# Altium PCB praline.PcbDoc (part 3 of 8)
Units mm, origin at the board's own origin, x right, y up, seen from the top; angles counter-clockwise.
Board outline 152.4 x 101.6 mm, 6 copper layers (In2.Cu, F.Cu, B.Cu, In1.Cu, In3.Cu, In4.Cu); 581 components, 490 nets, 2812 pads, 953 vias.
Unrouted connection lines stored in the file: 404.
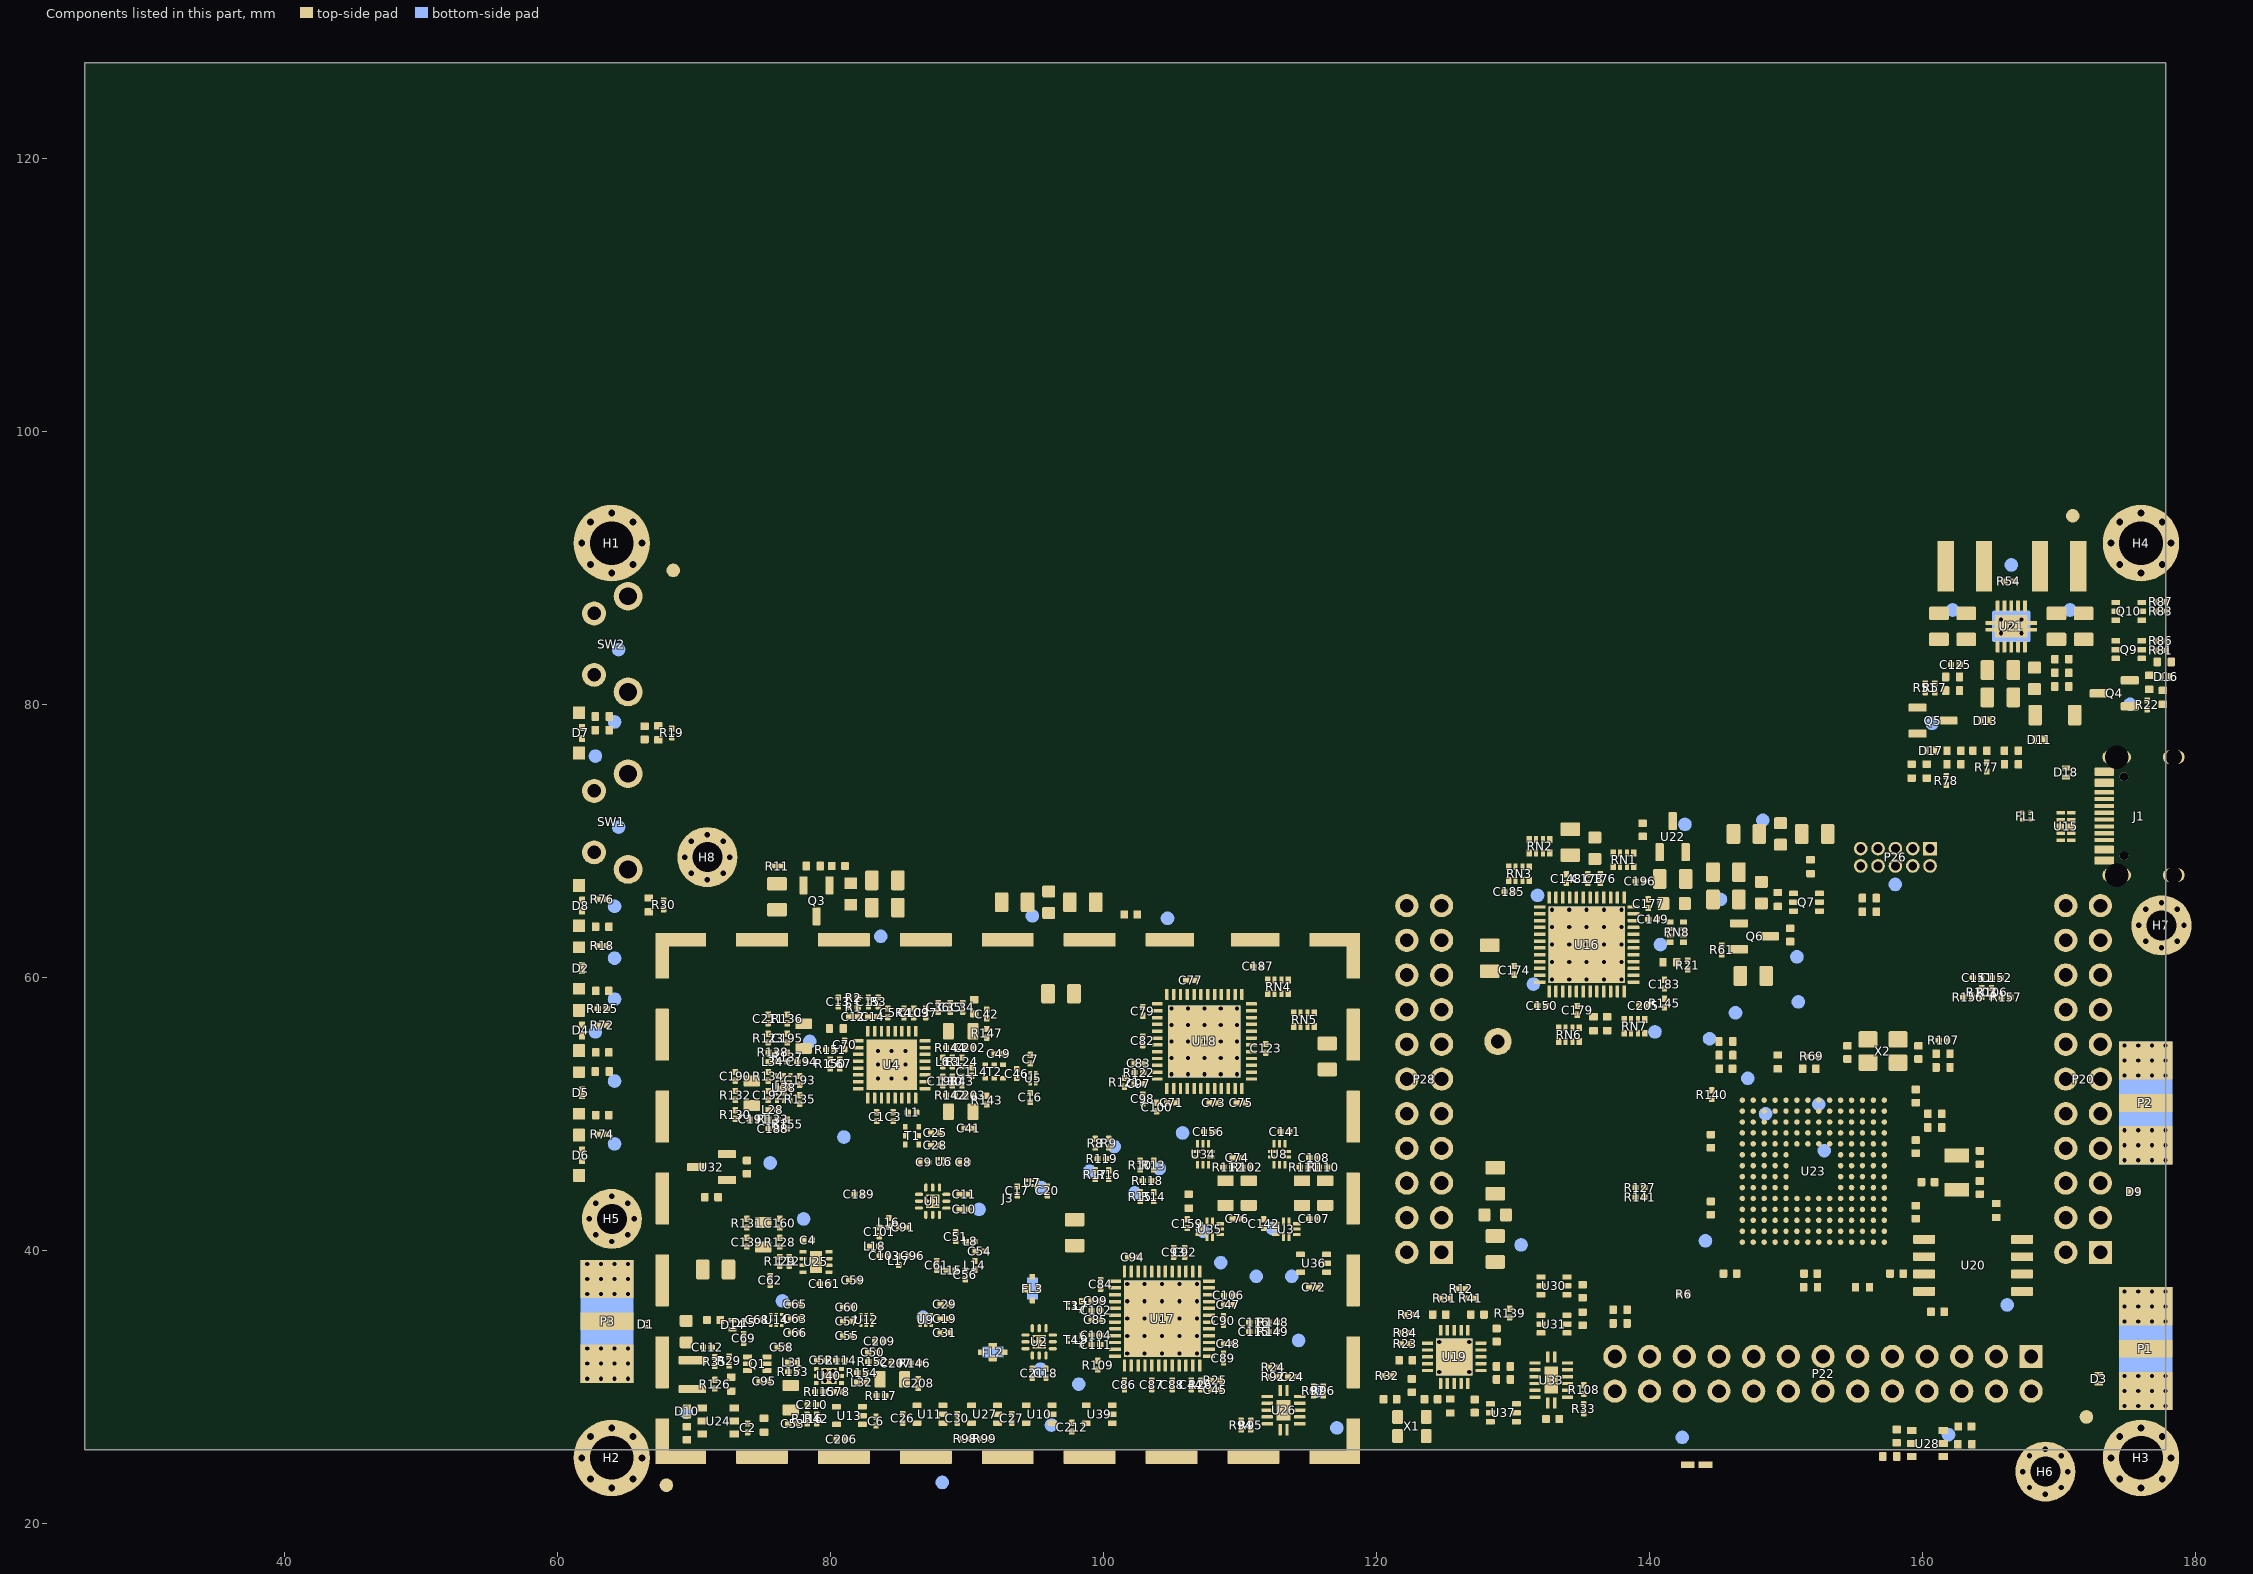
[diagram p6: the components of this part, seen from the top]

## Part data (continued)
D4: library part LED_Dual_Xinglight_XL-3210_Horizontal, "dual LED, right-angle, clear, http://www.xinglight.cn/uploadfile/202405/d1f88933723f.pdf", Manufacturer=Xinglight, Part Number=XL-3210SURSYGC, Datasheet=http://www.xinglight.cn/uploadfile/202405/f7c44c9c37b981e.pdf, Description="LED RED,YLW-GRN 1204 SMD", ki_fp_filters="LED* LED_SMD:* LED_THT:*"
D5: library part LED_Single_Xinglight_XL-3210_Horizontal, "LED, right-angle, clear, http://www.xinglight.cn/uploadfile/202212/7a7994c6a7a4fd8.pdf", Manufacturer=Xinglight, Part Number=XL-3210UOC, Datasheet=http://www.xinglight.cn/uploadfile/202405/90b8e96b4421088.pdf, Description="LED ORANGE 1204 SMD,1.5X3.2MM", Sim.Pins="1=K 2=A", ki_fp_filters="LED* LED_SMD:* LED_THT:*"
D6 D7 D8: library part LED_Dual_Xinglight_XL-3210_Horizontal, "dual LED, right-angle, clear, http://www.xinglight.cn/uploadfile/202405/d1f88933723f.pdf", Manufacturer=Xinglight, Part Number=XL-3210SURUBC, Datasheet=http://www.xinglight.cn/uploadfile/202405/d1f88933723f.pdf, Description="LED RED,BLUE 1204 SMD,1.5X3.2MM", ki_fp_filters="LED* LED_SMD:* LED_THT:*"
D10: library part TSLP-2-19, "https://www.infineon.com/cms/en/product/packages/PG-TSLP/PG-TSLP-2-19/", Manufacturer=Nexperia, Part Number=PMEG4010ESBYL, Datasheet=https://assets.nexperia.com/documents/data-sheet/PMEG4010ESB.pdf, Description="DIODE SCHOTTKY 40V 1A DSN1006-2", ki_fp_filters="TO-???* *_Diode_* *SingleDiode* D_*"
D11: library part TSLP-2-19, "https://www.infineon.com/cms/en/product/packages/PG-TSLP/PG-TSLP-2-19/", Manufacturer=Nexperia, Part Number=BZX884-B6V2,315, Tolerance=±2%, Datasheet=https://assets.nexperia.com/documents/data-sheet/BZX884_BC_SER.pdf, Description="DIODE ZENER 6.2V 250MW DFN1006-2", ki_fp_filters="TO-???* *_Diode_* *SingleDiode* D_*"
D12: library part D_SOD-123FL, "D_SOD-123FL", Manufacturer="Yangzhou Yangjie", Part Number=U1D, Datasheet=https://www.21yangjie.com/pdf/zlqj/ckfhejg/U1A%20THRU%20U1J.pdf, Description="SOD-123FL 200V 1.0A  Diodes Rec", ki_fp_filters="TO-???* *_Diode_* *SingleDiode* D_*"
D13: library part TSLP-2-19, "https://www.infineon.com/cms/en/product/packages/PG-TSLP/PG-TSLP-2-19/", Manufacturer=Yageo, Part Number=RC0201JR-070RL, Datasheet=~, Description="RES 0 OHM JUMPER 1/20W 0201", ki_fp_filters="TO-???* *_Diode_* *SingleDiode* D_*"
D14: library part TSLP-2-19, "https://www.infineon.com/cms/en/product/packages/PG-TSLP/PG-TSLP-2-19/", Manufacturer=Infineon, Part Number=BAR9002ELE6327XTMA1, Datasheet=https://www.infineon.com/dgdl/Infineon-BAR90-02EL-DS-v01_00-EN.pdf?fileId=5546d46265f064ff01663895cd694e6e, Description="RF DIODE PIN 80V 250MW TSLP-2-19", ki_fp_filters="TO-???* *_Diode_* *SingleDiode* D_*"
D15: library part TSSLP-2-1, "https://www.infineon.com/cms/en/product/packages/PG-TSSLP/PG-TSSLP-2-1/", Manufacturer=Toshiba, Part Number=JDH2S02SL,L3F, Datasheet=https://toshiba.semicon-storage.com/info/docget.jsp?did=30457&prodName=JDH2S02SL, Description="DIODE SCHOTTKY 10V 10MA SL2", ki_fp_filters="TO-???* *_Diode_* *SingleDiode* D_*"
D16 D17: library part TSLP-2-19, "https://www.infineon.com/cms/en/product/packages/PG-TSLP/PG-TSLP-2-19/", Manufacturer=Nexperia, Part Number=BZX884-B5V6,315, Tolerance=±2%, Datasheet=https://assets.nexperia.com/documents/data-sheet/BZX884_BC_SER.pdf, Description="DIODE ZENER 5.6V 250MW DFN1006-2", ki_fp_filters="TO-???* *_Diode_* *SingleDiode* D_*"
D18: library part TSLP-2-19, "https://www.infineon.com/cms/en/product/packages/PG-TSLP/PG-TSLP-2-19/", Manufacturer=MDD, Part Number=ESD8D12V, Datasheet=https://en.microdiode.com/uploadfiles//PDF/ESD8Dxxx-Series-DFN1006.pdf, Description="TVS DIODE 12V UNIDIRECTIONAL DFN1006", ki_fp_filters="TO-???* *_Diode_* *SingleDiode* D_*"